# Altium PCB GATE_BOARD.PcbDoc
Units mm, origin at the board's own origin, x right, y up, seen from the top; angles counter-clockwise.
Board outline 34 x 31 mm, 2 copper layers (Top Layer, Bottom Layer), stack 1.071 mm thick; 18 components, 8 nets, 36 pads, 0 vias.
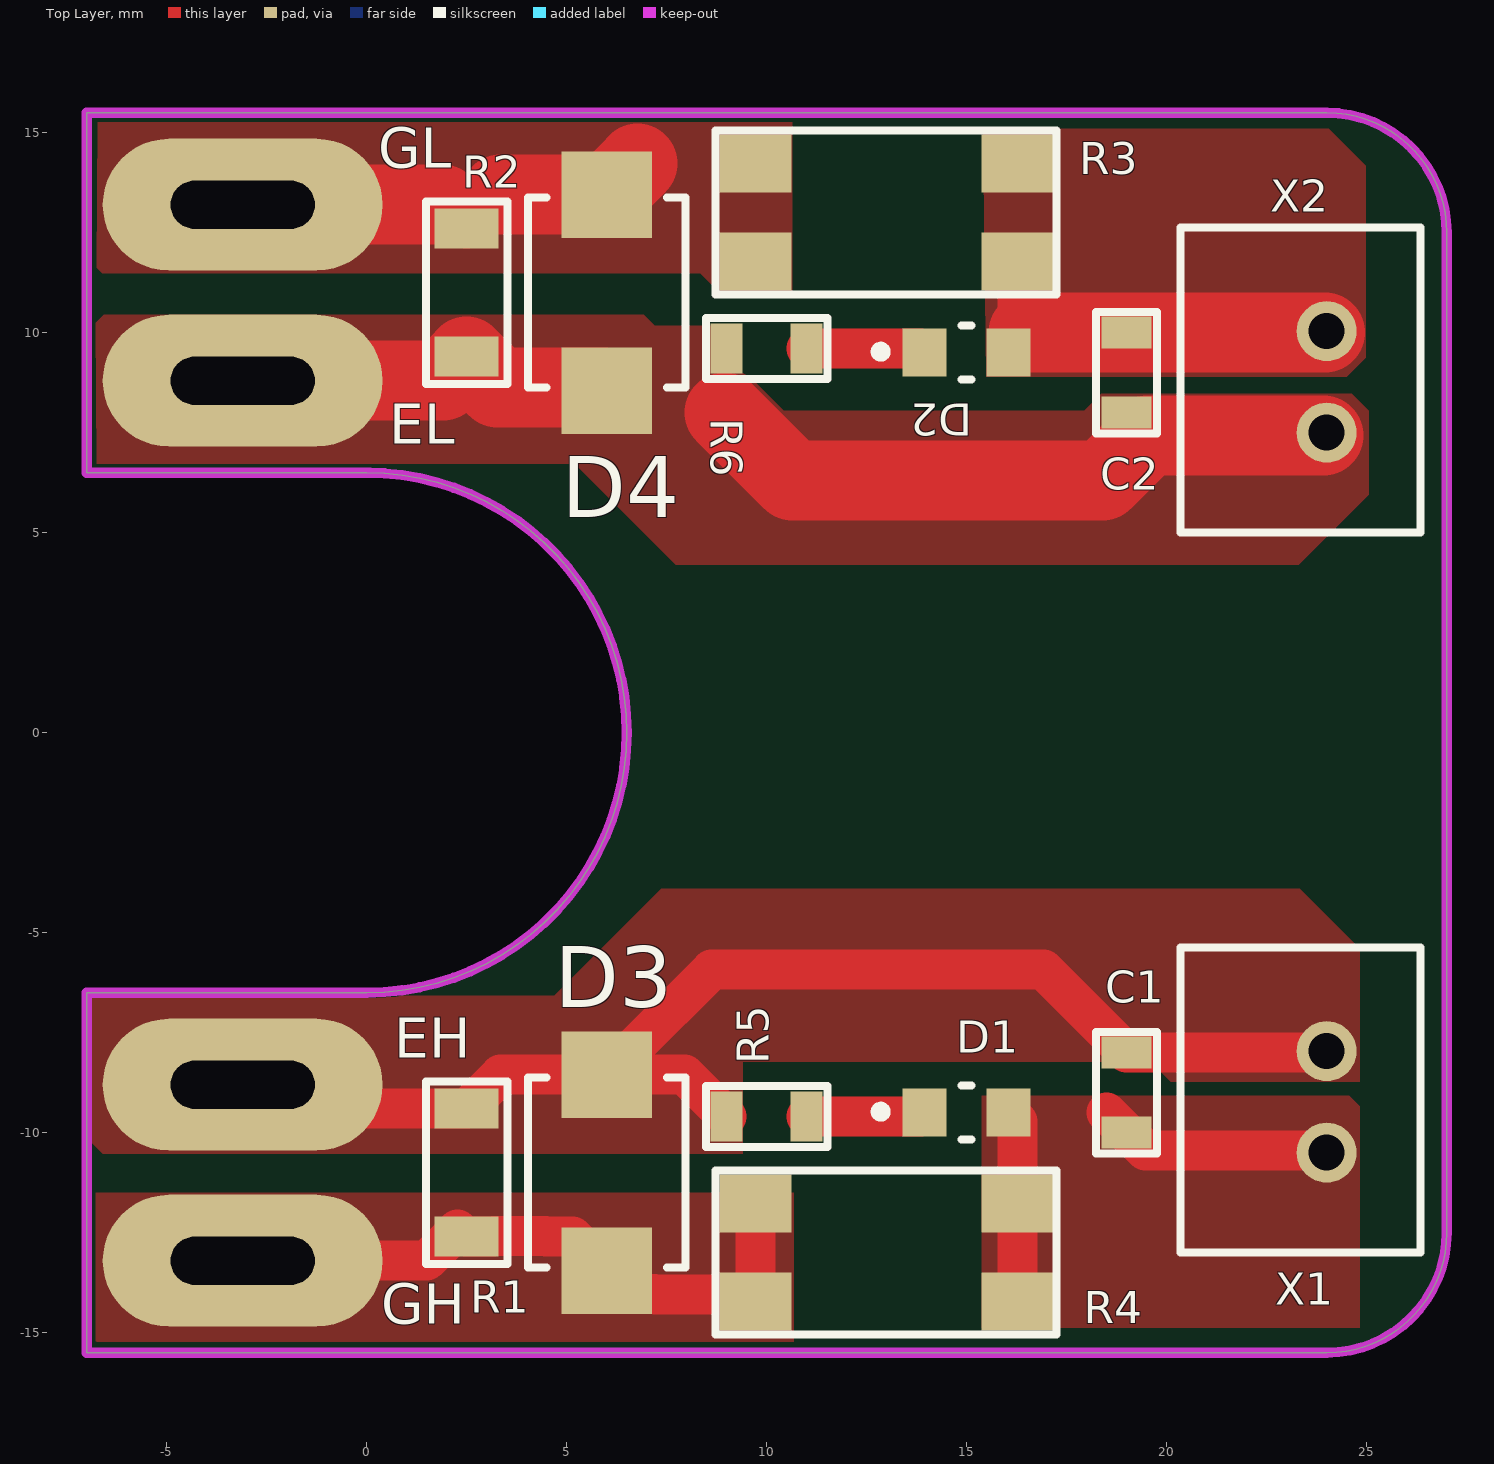
[diagram p0: Top Layer view]
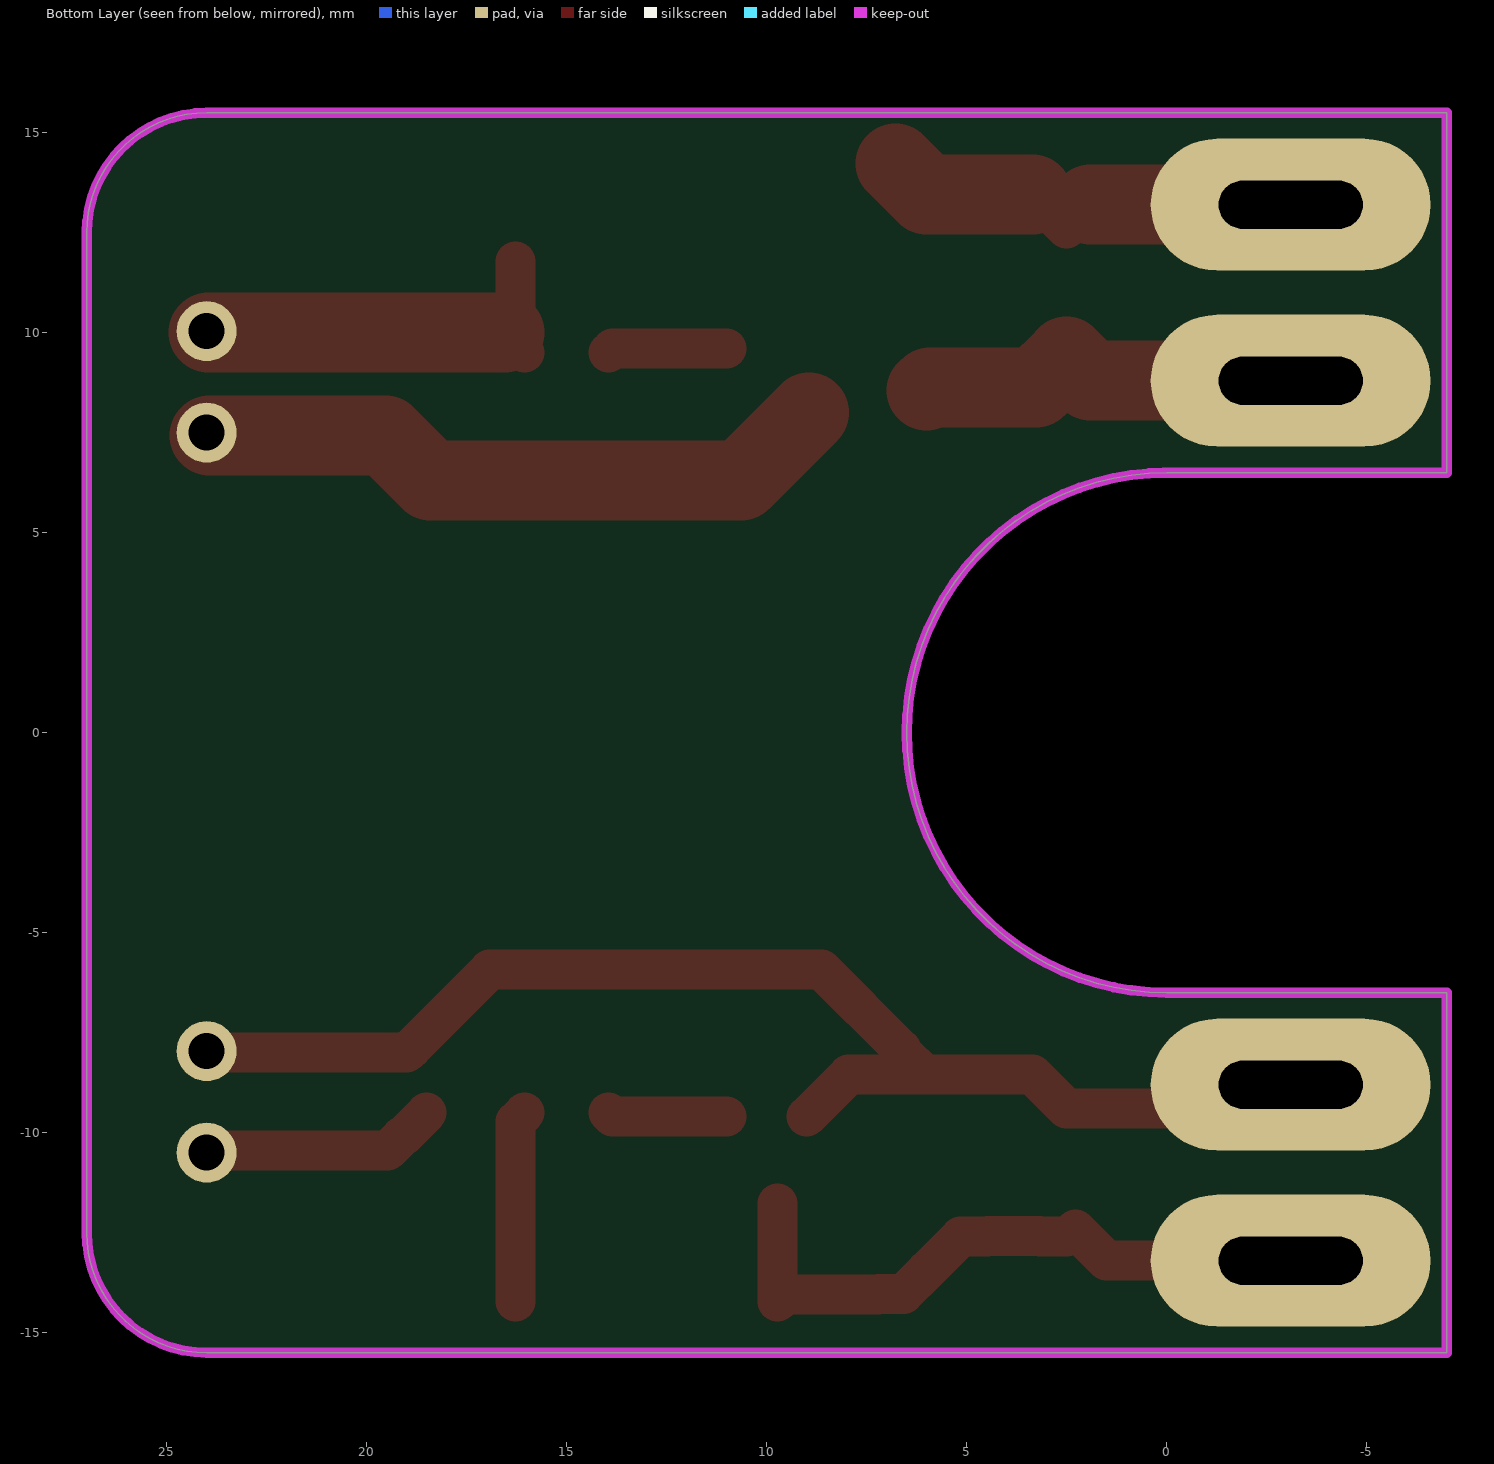
[diagram p1: Bottom Layer view, seen from below]
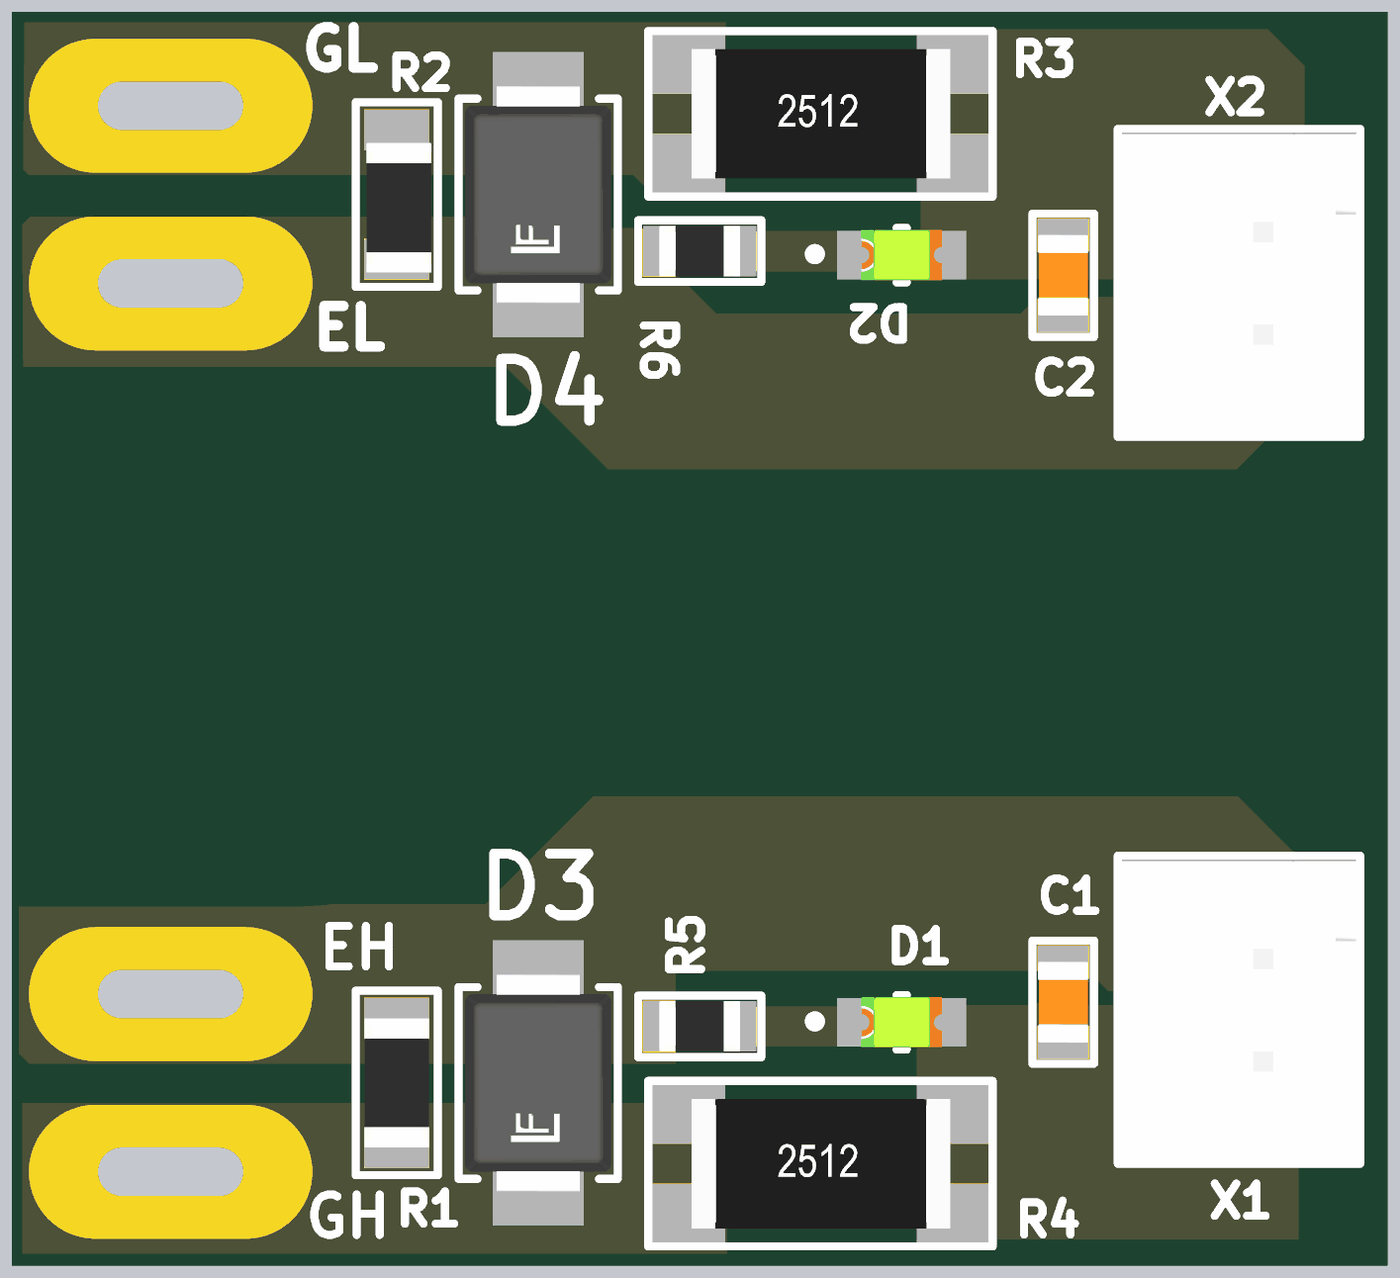
[diagram p2: 3D render of the assembled board from above, using the file's embedded part models]

## Layer stack, top to bottom
Top Solder: solder mask 0.0102, Solder Resist, Dk 3.5
Top Layer: signal copper 0.0356
Dielectric 1: dielectric 1, FR-4, Dk 4.8
Bottom Layer: signal copper 0.0356
Bottom Solder: solder mask 0.0102, Solder Resist, Dk 3.5

## Board outline
-7,-15.5 -7,-6.5 0,-6.5 ccw(c0,0) 0,6.5 -7,6.5 -7,15.5 24,15.5 cw(c24,12.5) 27,12.5 27,-12.5 cw(c24,-12.5) 24,-15.5

## Design rules (kind name [scope] priority, off if disabled: settings)
Clearance Clearance_1 [All vs InNet('GND_1')] p1: gap=0.2 ignorepadtopadclearanceinfootprint=FALSE
Clearance [All vs InNet('GND')] p2: gap=0.25 ignorepadtopadclearanceinfootprint=FALSE except(0.2: SMDPad-SMDPad SMDPad-THPad SMDPad-Via SMDPad-Fill SMDPad-Poly SMDPad-Region SMDPad-Text SMDPad-Hole THPad-THPad THPad-Via THPad-Fill THPad-Poly THPad-Region THPad-Text THPad-Hole Text-Text Text-Hole)
ComponentClearance [All] p1: gap=-3 collisioncheckmode=3 verticalgap=0.254 showdistances=FALSE
DiffPairsRouting [All] p1: maxlimit=0.254 minlimit=0.254 mostfreqgap=0.254 substack1={A23D90DD-733B-49C5-8102-56B3D284E3A0} toplayer_{a23d90dd-733b-49c5-8102-56b3d284e3a0}_minwidth=0.381 toplayer_{a23d90dd-733b-49c5-8102-56b3d284e3a0}_maxwidth=0.381 toplayer_{a23d90dd-733b-49c5-8102-56b3d284e3a0}_prefwidth=0.381 bottomlayer_{a23d90dd-733b-49c5-8102-56b3d284e3a0}_minwidth=0.381 bottomlayer_{a23d90dd-733b-49c5-8102-56b3d284e3a0}_maxwidth=0.381 bottomlayer_{a23d90dd-733b-49c5-8102-56b3d284e3a0}_prefwidth=0.381 toplayer_minwidth=0.381 toplayer_maxwidth=0.381 toplayer_prefwidth=0.381 bottomlayer_minwidth=0.381 bottomlayer_maxwidth=0.381 bottomlayer_prefwidth=0.381 substack2={0B3DB408-A969-412D-8C07-BA8AE97219D9} toplayer_{0b3db408-a969-412d-8c07-ba8ae97219d9}_minwidth=0.381 toplayer_{0b3db408-a969-412d-8c07-ba8ae97219d9}_maxwidth=0.381 toplayer_{0b3db408-a969-412d-8c07-ba8ae97219d9}_prefwidth=0.381 bottomlayer_{0b3db408-a969-412d-8c07-ba8ae97219d9}_minwidth=0.381 bottomlayer_{0b3db408-a969-412d-8c07-ba8ae97219d9}_maxwidth=0.381 bottomlayer_{0b3db408-a969-412d-8c07-ba8ae97219d9}_prefwidth=0.381 substack3={378827E6-B38F-4565-9D2F-710D8D441C30} toplayer_{378827e6-b38f-4565-9d2f-710d8d441c30}_minwidth=0.381 toplayer_{378827e6-b38f-4565-9d2f-710d8d441c30}_maxwidth=0.381 toplayer_{378827e6-b38f-4565-9d2f-710d8d441c30}_prefwidth=0.381 bottomlayer_{378827e6-b38f-4565-9d2f-710d8d441c30}_minwidth=0.381 bottomlayer_{378827e6-b38f-4565-9d2f-710d8d441c30}_maxwidth=0.381 bottomlayer_{378827e6-b38f-4565-9d2f-710d8d441c30}_prefwidth=0.381 substack4={1E65D4A7-266F-4925-B814-5E9C4A66F8EE} toplayer_{1e65d4a7-266f-4925-b814-5e9c4a66f8ee}_minwidth=0.381 toplayer_{1e65d4a7-266f-4925-b814-5e9c4a66f8ee}_maxwidth=0.381 toplayer_{1e65d4a7-266f-4925-b814-5e9c4a66f8ee}_prefwidth=0.381 bottomlayer_{1e65d4a7-266f-4925-b814-5e9c4a66f8ee}_minwidth=0.381 bottomlayer_{1e65d4a7-266f-4925-b814-5e9c4a66f8ee}_maxwidth=0.381 bottomlayer_{1e65d4a7-266f-4925-b814-5e9c4a66f8ee}_prefwidth=0.381 substack5={93C5D03E-862D-45F8-9871-970EEA9B3F11} toplayer_{93c5d03e-862d-45f8-9871-970eea9b3f11}_minwidth=0.381 toplayer_{93c5d03e-862d-45f8-9871-970eea9b3f11}_maxwidth=0.381 toplayer_{93c5d03e-862d-45f8-9871-970eea9b3f11}_prefwidth=0.381 bottomlayer_{93c5d03e-862d-45f8-9871-970eea9b3f11}_minwidth=0.381 bottomlayer_{93c5d03e-862d-45f8-9871-970eea9b3f11}_maxwidth=0.381 bottomlayer_{93c5d03e-862d-45f8-9871-970eea9b3f11}_prefwidth=0.381 maxuncoupledlength=12.7
Height [All] p1: minheight=0 maxheight=50 prefheight=33
HoleSize [All] p1: absolutevalues=TRUE maxlimit=6 minlimit=0.01 maxpercent=80.000 minpercent=20.000
HoleToHoleClearance [All] p1: gap=0.1 allowstackedmicrovias=TRUE
MinimumSolderMaskSliver [All] p1: minsoldermaskwidth=0.1
PlaneClearance [All] p1: clearance=0.7
PlaneConnect [All] p1: planeconnectstyle=Direct reliefexpansion=0.5 reliefentries=4 reliefconductorwidth=0.5 reliefairgap=0.15
PolygonConnect VQFN20 [HasFootprint('VQFN20')] p1: connectstyle=Direct reliefconductorwidth=0.254 reliefentries=4 polygonreliefangle="90 Angle" airgapwidth=0.254
PolygonConnect [All] p2: connectstyle=Direct reliefconductorwidth=0.3 reliefentries=4 polygonreliefangle="90 Angle" airgapwidth=0.15
RoutingVias [All] p1: holewidth=0.1 width=0.1 viastyle="Through Hole" minholewidth=0 minwidth=0.3 maxholewidth=2 maxwidth=4
ShortCircuit [All] p1: allowed=TRUE
SilkToSolderMaskClearance [IsPad] p1: minsilkscreentomaskgap=0.1 clearancetoexposedcopper=TRUE
SolderMaskExpansion SolderMaskExpansion_Via [IsVia] p1: expansion=0.102 istentingtop=TRUE
SolderMaskExpansion [All] p2: expansion=0.01 istentingtop=FALSE
UnRoutedNet [All] p1: checkbadconnections=TRUE
Width [All] p1: maxlimit=5 minlimit=0.2 preferedwidth=0.3 substack1={A23D90DD-733B-49C5-8102-56B3D284E3A0} substack2={0B3DB408-A969-412D-8C07-BA8AE97219D9} substack3={378827E6-B38F-4565-9D2F-710D8D441C30} substack4={1E65D4A7-266F-4925-B814-5E9C4A66F8EE} substack5={93C5D03E-862D-45F8-9871-970EEA9B3F11}
19 further rules are at their usual default settings.

## Components (designator, comment, footprint, x,y, rotation, side; value= is the part's Value field where it differs from the comment)
C1 "330" CAP-0805 19,-9 r270 top
C2 "330" CAP-0805 19,9 r270 top locked
D1 "151031YS06000" LED_GREEN 15,-9.5 r0 top locked
D2 "151031YS06000" LED_GREEN 15,9.5 r0 top locked
D3 "SMBJ18CA" FP-SMBJ-MFG 6,-11 r270 top locked
D4 "SMBJ18CA" FP-SMBJ-MFG 6,11 r270 top locked
EH "Test_Point_PCB" Conn_Pad#1 -3.1,-8.8 r0 top
EL "Test_Point_PCB" Conn_Pad#2 -3.175,8.825 r0 top
GH "GH" Conn_Pad#3 -3.2,-13.475 r90 top (schematic designator TP4)
GL "Test_Point_PCB" Conn_Pad#1 -3.1,13.2 r0 top
R1 "10K" RES-1206 2.5,-11 r270 top locked
R2 "10K" RES-1206 2.5,11 r270 top locked
R3 "5.1" RES-2512 13,13 r0 top locked
R4 "5.1" RES-2512 13,-13 r0 top locked
R5 "1K" RES-0805 10,-9.6 r180 top locked
R6 "1K" RES-0805 10,9.6 r180 top locked
X1 "CONN-2-PIN" CONN-PLS-2-2.54mm 24,-10.5 r90 top locked
X2 "CONN-2-PIN" CONN-PLS-2-2.54mm 24,7.5 r90 top locked

## Footprints (in the part's own frame and the unit in brackets; to place one, negate y for a bottom-side part, rotate by r counter-clockwise, add the part's x,y. Pads: shape width x height; smd on the part's side, far side on the other; paste and mask are expansions set on the pad)
CAP-0805 [mm]
  rect 0.8x1.25 smd mask+0.015: 1(-1,0) 2(1,0)
  silkscreen extent -1.52,-0.76 1.52,0.76, body extent -1,-0.62 1,0.63, height 0.8
CONN-PLS-2-2.54mm [mm]
  round 1.5 hole 0.9: 1(0,0) 2(2.54,0)
  silkscreen extent -2.5,-2.35 5.13,3.65, body extent -2.4,-2.25 5,3.55, height 7
Conn_Pad#1 [mm]
  oval 7x3.3 hole 1.2 slot 3.6 at 0 deg: 1(0,0)
Conn_Pad#2 [mm]
  oval 7x3.3 hole 1.2 slot 3.6 at 0 deg: 1(0.075,-0.025)
Conn_Pad#3 [mm]
  oval 3.3x7 hole 1.2 slot 3.6 at 90 deg: 1(0.275,-0.1)
FP-SMBJ-MFG [mm]
  rect 2.16x2.26 smd paste+0 mask+0: 1(-2.45,0) 2(2.45,0)
  silkscreen extent -2.37,-1.97 2.37,1.97, body extent -3.63,-2.07 3.63,2.07, height 0.25
LED_GREEN [mm]
  rect 1.1x1.2 smd paste+0 mask+0: 1(1.05,0) 2(-1.05,0)
  silkscreen extent -2.27,-0.67 0.13,0.67, body extent -1,-0.63 1,0.63, height 0.8
RES-0805 [mm]
  rect 0.8x1.25 smd mask+0.015: 1(-1,0) 2(1,0)
  silkscreen extent -1.52,-0.76 1.52,0.76, body extent -1,-0.62 1,0.63, height 0.6
RES-1206 [mm]
  rect 1x1.6 smd: 1(-1.6,0) 2(1.6,0)
  silkscreen extent -2.29,-1.02 2.29,1.02, body extent -1.6,-0.8 1.6,0.8, height 0.6
RES-2512 [mm]
  rect 1.8x1.45 smd: 1(-3.275,-1.225) 1(-3.275,1.225) 2(3.275,-1.225) 2(3.275,1.225)
  silkscreen extent -4.28,-2.05 4.25,2.05, body extent -3.2,-1.6 3.2,1.6, height 0.6

## Part data
C1 C2: library part CAP-NON-POLAR
D1 D2: library part LED, "WURTH ELEKTRONIK - 151031YS06000 - LED, Yellow, Through Hole, T-1 (3mm), 30 mA, 2 V, 590 nm", Manufacturer_Name="Wurth Elektronik", Mouser Part Number=710-151031YS06000, Datasheet Link=https://katalog.we-online.de/led/datasheet/151031YS06000.pdf, Geometry.Height=5.5mm, Manufacturer_Part_Number=151031YS06000, Mouser Price/Stock=https://www.mouser.co.uk/ProductDetail/Wurth-Elektronik/151031YS06000?qs=LlUlMxKIyB3xSYYW%252BcuBiQ%3D%3D
D3 D4: library part CMP-08607-000021-1, "TVS DIODE 18V 29.2V DO214AA", Breakdown Voltage=20V, Clamping Voltage=29.2V, Manufacturer="Littelfuse Inc", Max Junction Temp=+150°C, Package=SMBJ, Peak Pulse Current=20.6A, Peak Pulse Power=600W, Reverse Standoff Voltage=18V, Temperature="-65°C to +150°C", Temperature Range Low=-65°C, Automotive=No, Category=Diode, ComponentLink2Description=Datasheet, ComponentLink2URL=https://www.littelfuse.com/~/media/electronics/datasheets/tvs_diodes/littelfuse_tvs_diode_smbj_datasheet.pdf.pdf, Device Class L1="Circuit Protection", Device Class L2="TVS Diodes", Device Class L3=unset, Digikey Description="TVS DIODE 18V 29.2V DO214AA", Direction=Bidirectional, Height=2.61mm, Lead Free=Yes, Manufacturer Part Number=SMBJ18CA, Mouser Description="SMBJ Series 29.2 V 0.6 kW Surface Mount Bi-Directional TVS Diode - DO-214AA", Number of Channels=1, Octopart=https://octopart.com/smbj18ca-littelfuse-350695, RoHS=TRUE, Temperature Range High=+150°C
EH EL GH GL: library part TP_PCB?, "Test_Point"
R1 R2 R3 R4 R5 R6: library part RES-CONST

## Nets (pads, with @x,y where several pads share a name; then routed paths per layer and width w, separated by ;. In a path a pad name is that pad's centre, name@x,y a point inside that pad or via, vN(x,y) a via of type N, cw(c..) or ccw(c..) an arc to the next point about the centre after c; other vN are vias at no path point)
E_H: C1.1 D3.1 EH.1 R1.1 R5.2 X1.2 | length 33.1
  Top Layer w1: EH.1 -2.5,-9.4 R1.1 3.35,-8.55 D3.1 ; R5.2 7.95,-8.55 D3.1 ; X1.2 23.96,-8 C1.1 18.9,-7.9 18.875,-7.9 18.875,-7.875 16.925,-5.925 8.625,-5.925 6.63,-7.92 6.63,-7.97 6.05,-8.55 D3.1
E_L: C2.2 D4.2 EL.1 R2.2 R6.2 X2.1 | length 27.9
  Top Layer w1: 8.914,8.03 8.944,8 9.569,8 9.844,7.725 ; X2.1@23.925,7.425 X2.1 ; D4.2@5.975,8.45 6.425,8.45 D4.2@5.975,8.45
  Top Layer w2: EL.1 -3.091,8.809 1.909,8.809 R2.2 3.27,8.63 5.92,8.63 D4.2 ; 8.944,8 10.644,6.3 18.4,6.3 19.525,7.425 X2.1@23.925,7.425
NetC1_2: C1.2 D1.1 R4.2 X1.1 | length 10.7
  Top Layer w1: D1.1 16.275,-9.725 16.275,-11.775 R4.2@16.275,-14.225 ; 18.5,-9.5 19.1,-10.1 19.125,-10.1 19.475,-10.45 X1.1@23.95,-10.45
NetC2_1: C2.1 D2.1 R3.2 X2.2 | length 10.5
  Top Layer w1: R3.2@16.275,11.775 16.275,9.725 D2.1 D2.1@16.55,10 ; X2.2@23.96,10 X2.2
  Top Layer w2: D2.1@16.55,10 C2.1 X2.2@23.96,10
NetD1_2: D1.2 R5.1 | length 3
  Top Layer w1: R5.1 13.85,-9.6 D1.2
NetD2_2: D2.2 R6.1 | length 3
  Top Layer w1: R6.1 13.85,9.6 D2.2
NetD3_2: D3.2 GH.1 R1.2 R4.1 | length 16.1
  Top Layer w1: GH.1 1.5,-13.2 R1.2@2.275,-12.425 ; R1.2 3.163,-12.6 3.185,-12.578 4.465,-12.578 4.488,-12.6 5.15,-12.6 D3.2 6.58,-14.03 7.196,-14.03 7.216,-14.05 9.55,-14.05 9.725,-14.225 R4.1@9.725,-11.775
NetD4_1: D4.1 GL.1 R2.1 R3.1 | length 10.8
  Top Layer w1: 1.9,13.2 R2.1 3.35,13.45
  Top Layer w2: GL.1 1.9,13.2 ; 3.35,13.45 D4.1 D4.1@6.775,14.225

## Polygon pours and split planes (outlines as drawn)
E_L on Top Layer "E_L_L01_P008" (solid, pour order 8): 9.393,9 9.615,8.86 10.425,8.05 17.942,8.05 18.367,8.475 24.625,8.475 25.05,8.05 25.05,5.95 23.3,4.2 7.725,4.2 5.15,6.775 5.15,9
NetC1_2 on Top Layer "NETC1_2_L01_P007" (solid, pour order 7): 15.375,-9.075 24.562,-9.075 24.825,-9.338 24.825,-14.875 15.377,-14.875 15.375,-14.877 15.375,-8.825
E_H on Top Layer "E_H_L01_P006" (solid, pour order 6): 4.002,-7.259 7.361,-3.9 23.325,-3.9 24.825,-5.4 24.825,-8.725 20.1,-8.725 19.6,-8.225 7.987,-8.225
E_H on Top Layer "E_H_L01_P004" (solid, pour order 4): -6.9,-6.575 8.455,-6.575 9.4,-7.52 9.4,-10.525 -6.6,-10.525 -6.9,-10.225
NetD3_2 on Top Layer "NETD3_2_L01_P003" (solid, pour order 3): -6.775,-11.5 10.675,-11.5 10.675,-15.225 -6.75,-15.225 -6.775,-15.25
NetC2_1 on Top Layer "NETC2_1_L01_P002" (solid, pour order 2): 15.414,15.1 24.05,15.1 24.975,14.175 24.975,9.375 24.5,8.9 15.488,8.9
E_L on Top Layer "E_L_L01_P001" (solid, pour order 1): -6.775,10.45 6.921,10.45 7.196,10.175 9.35,10.175 9.35,7.025 9.05,6.725 -6.753,6.725
NetD4_1 on Top Layer "NETD4_1_L01_P000" (solid, pour order 0): -6.72,15.26 10.644,15.26 10.644,11.05 8.775,11.05 8.34,11.485 -6.755,11.485

## Keep-outs
Keep-Out Layer:
  lines w0.254: -7,-6.524 -7,-15.5 24,-15.5 ccw(c24,-12.5) 27,-12.5 27,12.5 ccw(c24,12.5) 24,15.5 -7,15.5 -7,6.5 0.075,6.5 ; -7,-6.5 0,-6.5 ccw(c0,0) 0,6.5